# Altium PCB current_limiting.PcbDoc
Units mil, origin at the board's own origin, x right, y up, seen from the top; angles counter-clockwise.
Board outline 6000 x 4000 mil, 2 copper layers (Top Layer, Bottom Layer); 5 components, 6 nets, 16 pads, 0 vias.
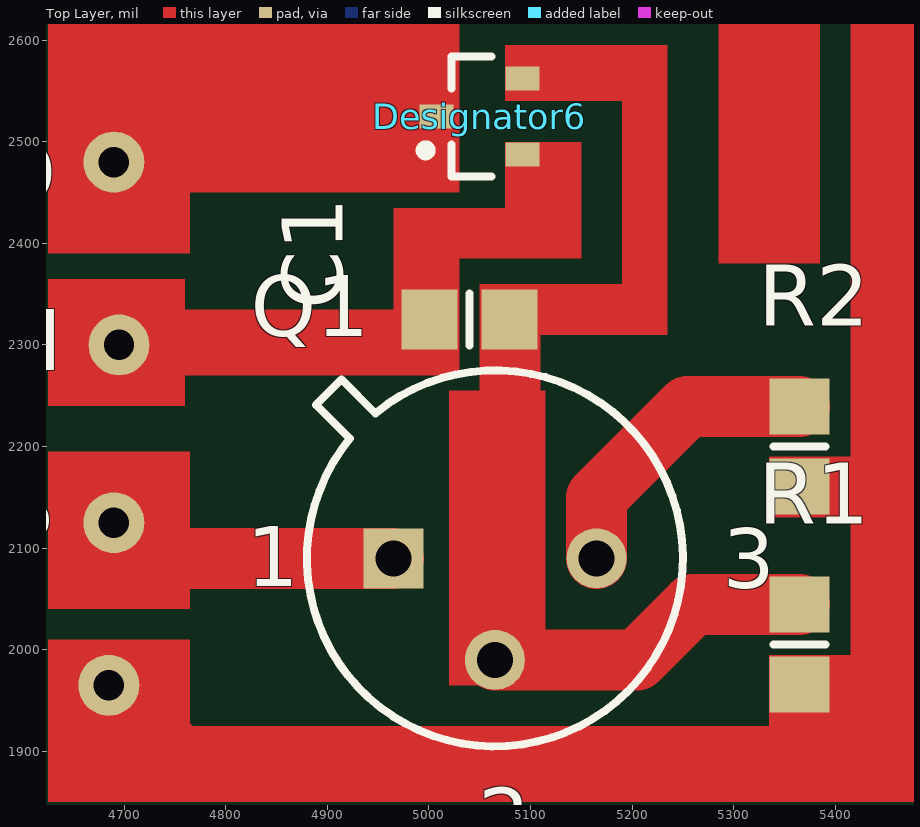
[diagram p0: Top Layer view]
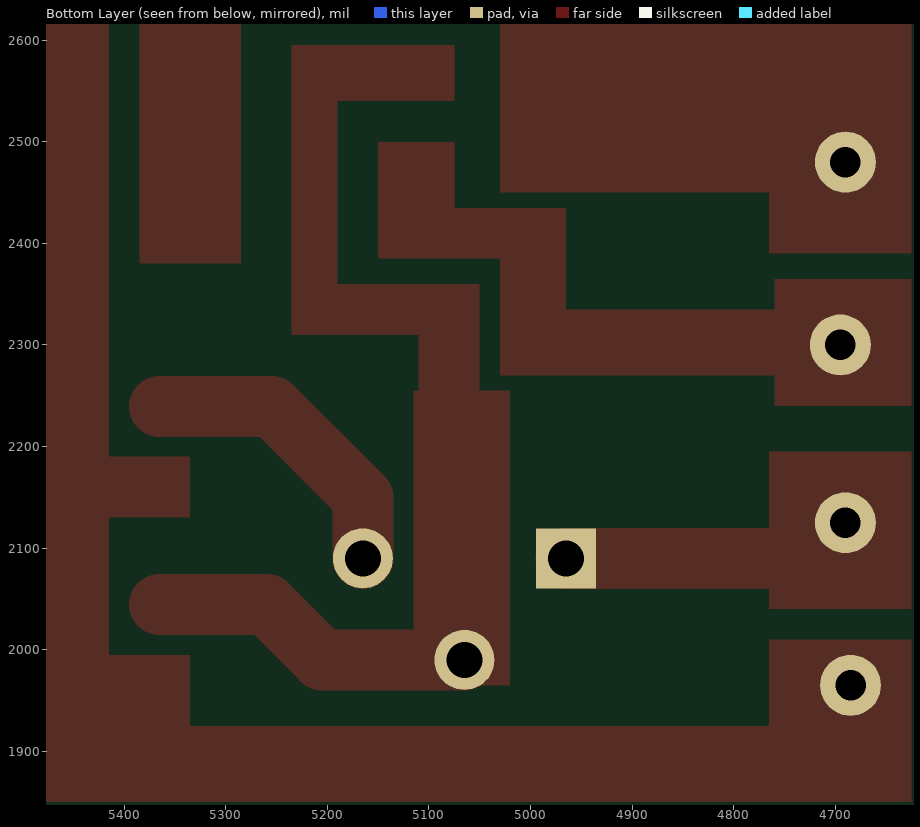
[diagram p1: Bottom Layer view, seen from below]

## Layer stack, top to bottom
Top Solder: solder mask 0.4, Solder Resist, Dk 3.5
Top Layer: signal copper 1.4
Dielectric 1: dielectric 12.6, FR-4, Dk 4.8
Bottom Layer: signal copper 1.4
Bottom Solder: solder mask 0.4, Solder Resist, Dk 3.5

## Board outline
1000,1000 7000,1000 7000,5000 1000,5000

## Design rules (kind name [scope] priority, off if disabled: settings)
Clearance [All] p1: gap=5
PolygonConnect [All] p1: connectstyle=Relief reliefconductorwidth=10 reliefentries=4 polygonreliefangle="90 Angle" airgapwidth=10
RoutingVias [All] p1: holewidth=28 width=50 viastyle="Through Hole" minholewidth=28 minwidth=50 maxholewidth=28 maxwidth=50
SolderMaskExpansion [All] p1: expansion=4
Width [All] p1: maxlimit=100 minlimit=10 preferedwidth=75 minimp=50.000000 maximp=50.000000 favimp=50.000000
30 further rules are at their usual default settings.

## Classes and differential pairs
component class Sheet1: C1 Q1 R1 R2

## Components (designator, comment, footprint, x,y, rotation, side; value= is the part's Value field where it differs from the comment)
C1 "Cap" 6-0805_M 5040,2325 r180 top
Designator6 "Comment" SOT23_L 5050,2525 r180 top
Q1 "PNP" TO-205AF 5065,2090 r0 top
R1 "Res2" 6-0805_M 5365,2005 r270 top
R2 "Res2" 6-0805_M 5365,2200 r270 top

## Footprints (in the part's own frame and the unit in brackets; to place one, negate y for a bottom-side part, rotate by r counter-clockwise, add the part's x,y. Pads: shape width x height; smd on the part's side, far side on the other; paste and mask are expansions set on the pad)
6-0805_M [mm] "Chip Resistor, Body 2.0x1.2mm, IPC Low Density"
  rect 1.4x1.5 smd: 1(-1,0) 2(1,0)
  silkscreen extent 0,-0.65 0,0.65, body extent -1.07,-0.7 1.07,0.7, height 0.7
SOT23_L [mm] "SOT23, 3-Leads, Body 2.9x1.3mm, Pitch 0.95mm, Lead Span 2.3mm - Reverse Pinning, IPC High Density"
  rect 0.85x0.6 smd: 1(1.075,0) 2(-1.075,-0.95) 3(-1.075,0.95)
  silkscreen extent -0.3,-1.5 1.47,1.5, body extent -0.7,-1.5 0.7,1.5, height 1.1
TO-205AF [mm] "Can; 3 Leads; Pin Circle Dia. 5.08 mm; Lead Dia. 0.53 mm (max)"
  rect 1.5x1.5 hole 0.9: 1(-2.54,0)
  round 1.5 hole 0.9: 2(0,-2.54) 3(2.54,0)
  silkscreen extent -4.7,-4.7 4.7,4.7

## Part data
C1: "Capacitor"
Q1: "PNP Bipolar Transistor"
R1 R2: "Resistor"

## Free pads (board coordinates)
  round 60 hole 30: 0(4690,2480) 1(4695,2300) 2(4690,2125) 3(4685,1965)

## Nets (pads, with @x,y where several pads share a name; then routed paths per layer and width w, separated by ;. In a path a pad name is that pad's centre, name@x,y a point inside that pad or via, vN(x,y) a via of type N, cw(c..) or ccw(c..) an arc to the next point about the centre after c; other vN are vias at no path point)
NetC1_1: C1.1 Designator6.2 Q1.2 R1.1 | length 322.5
  Top Layer w60: Q1.2 5205,1990 5259.37,2044.37 R1.1
NetC1_2: C1.2 Designator6.3 pad.1
NetL1_5: Designator6.1 pad.0
NetP1_1: pad.3 R1.2 R2.2 | length 795.2
  Top Layer w60: pad.3 4770,1880 5320,1880 ; 5365,1925 5370,1925 ; 5445,2000 5445,2120
NetP1_2: pad.2 Q1.1 | length 289.5
  Top Layer w60: pad.2 4725,2090 Q1.1
NetQ1_3: Q1.3 R2.1 | length 297
  Top Layer w60: Q1.3 5165,2150 5254.37,2239.37 R2.1

## Other copper
Top Layer:
  rectangle net NetL1_5: 5285,2380 5385,2755
  rectangle net NetL1_5: 4625,2625 5385,2755
  rectangle net NetL1_5: 4625,2540 4765,2750
  rectangle net NetC1_2: 4965,2290 5030,2435
  rectangle net NetC1_2: 4965,2385 5150,2435
  rectangle net NetC1_1: 5075,2540 5235,2595
  rectangle net NetC1_2: 5075,2405 5150,2500
  rectangle net NetC1_1: 5050,2310 5235,2360
  rectangle net NetC1_1: 5190,2345 5235,2580
  rectangle net NetC1_1: 5050,2220 5110,2360
  rectangle net NetL1_5: 4625,2390 4765,2405
  rectangle net NetP1_2: 4625,2130 4765,2195
  rectangle net NetP1_1: 5335,2130 5485,2190
  rectangle net NetP1_1: 5335,1905 5435,1995
  rectangle net NetP1_1: 5415,1850 5535,2750
  rectangle net NetP1_1: 4625,1850 5430,1925
  rectangle net NetC1_1: 5020,1965 5115,2255
  rectangle net NetL1_5: 4985,2545 5030,2565
  rectangle net NetP1_1: 4625,1860 4765,2010
  rectangle net NetP1_2: 4625,2040 4765,2175
  rectangle net NetL1_5: 4625,2405 4765,2540
  rectangle net NetC1_2: 4625,2240 4760,2365
  rectangle net NetL1_5: 4985,2490 5030,2545
  rectangle net NetL1_5: 4685,2450 5030,2720
  rectangle net NetC1_2: 4695,2270 5030,2335

## Silkscreen, mask and mechanical layers (free items; w line width, h text height)
Top Overlay:
  text "GND" at 4445,2440 h60
  text "CM" at 4510,2275 h60
  text "RAMP" at 4395,2085 h60
  text "VCC" at 4450,1915 h60

## Text inside footprints (layer, text, board x,y; h text height)
Q1: Top Overlay "3" at 5289.17,2060.43 h59.05; Top Overlay "2" at 5048.66,1805.04 h59.05; Top Overlay "1" at 4820.87,2062.56 h59.05